# Altium PCB mod_hw_tb6612.PcbDoc
Units mil, origin at the board's own origin, x right, y up, seen from the top; angles counter-clockwise.
Board outline 930 x 1255 mil, 2 copper layers (Top Layer, Bottom Layer); 19 components, 34 nets, 142 pads, 49 vias.
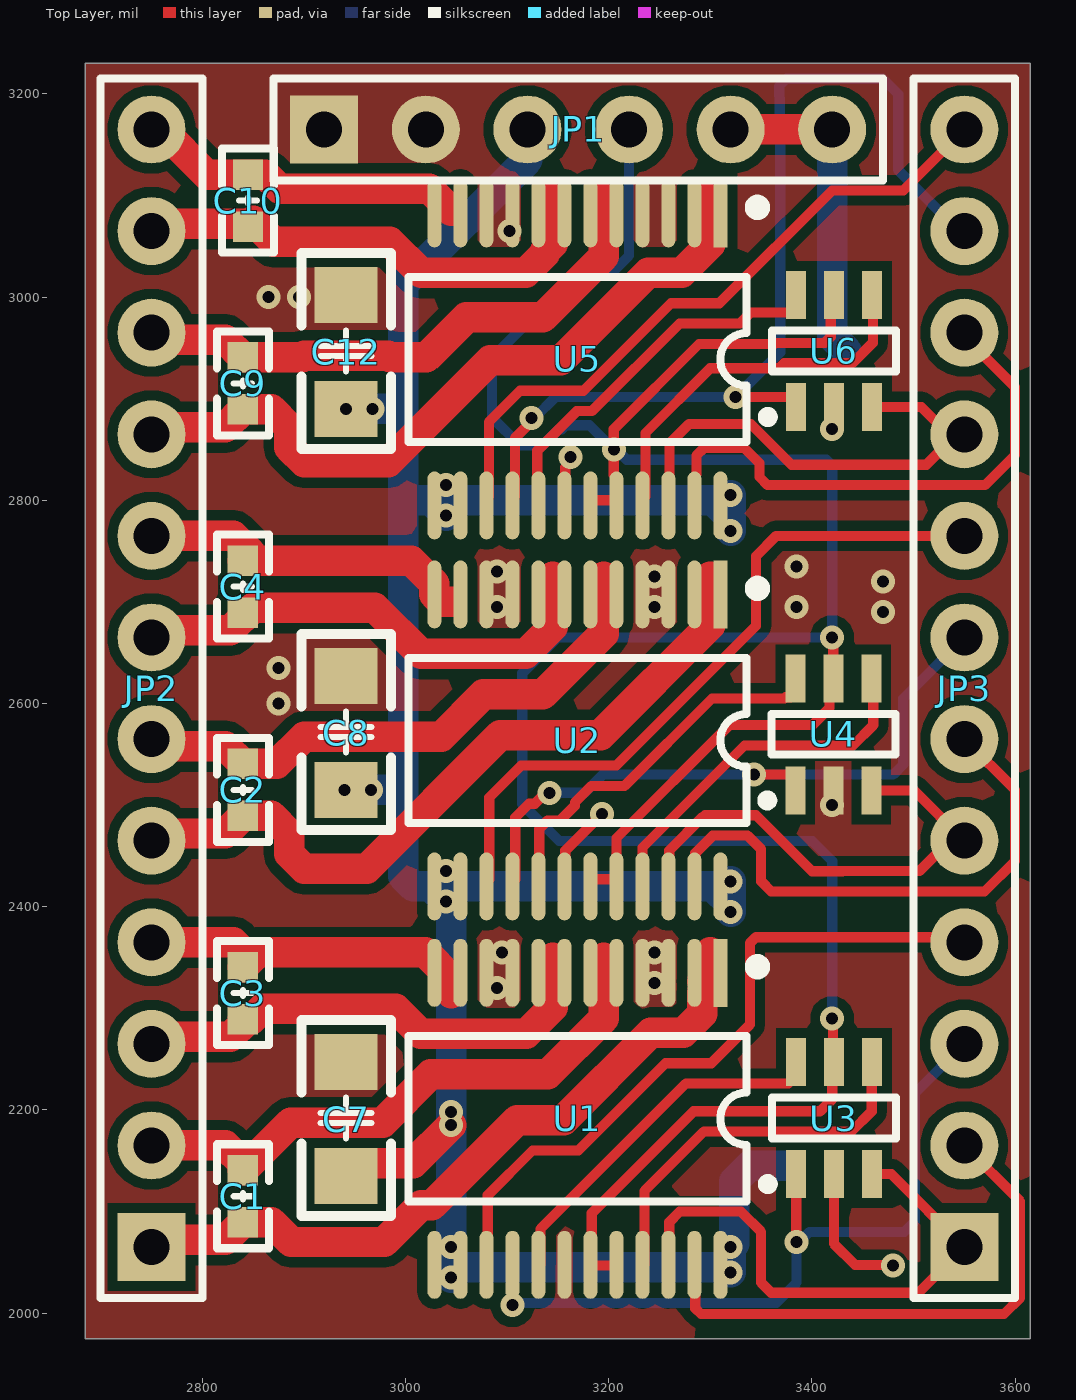
[diagram p0: Top Layer view]
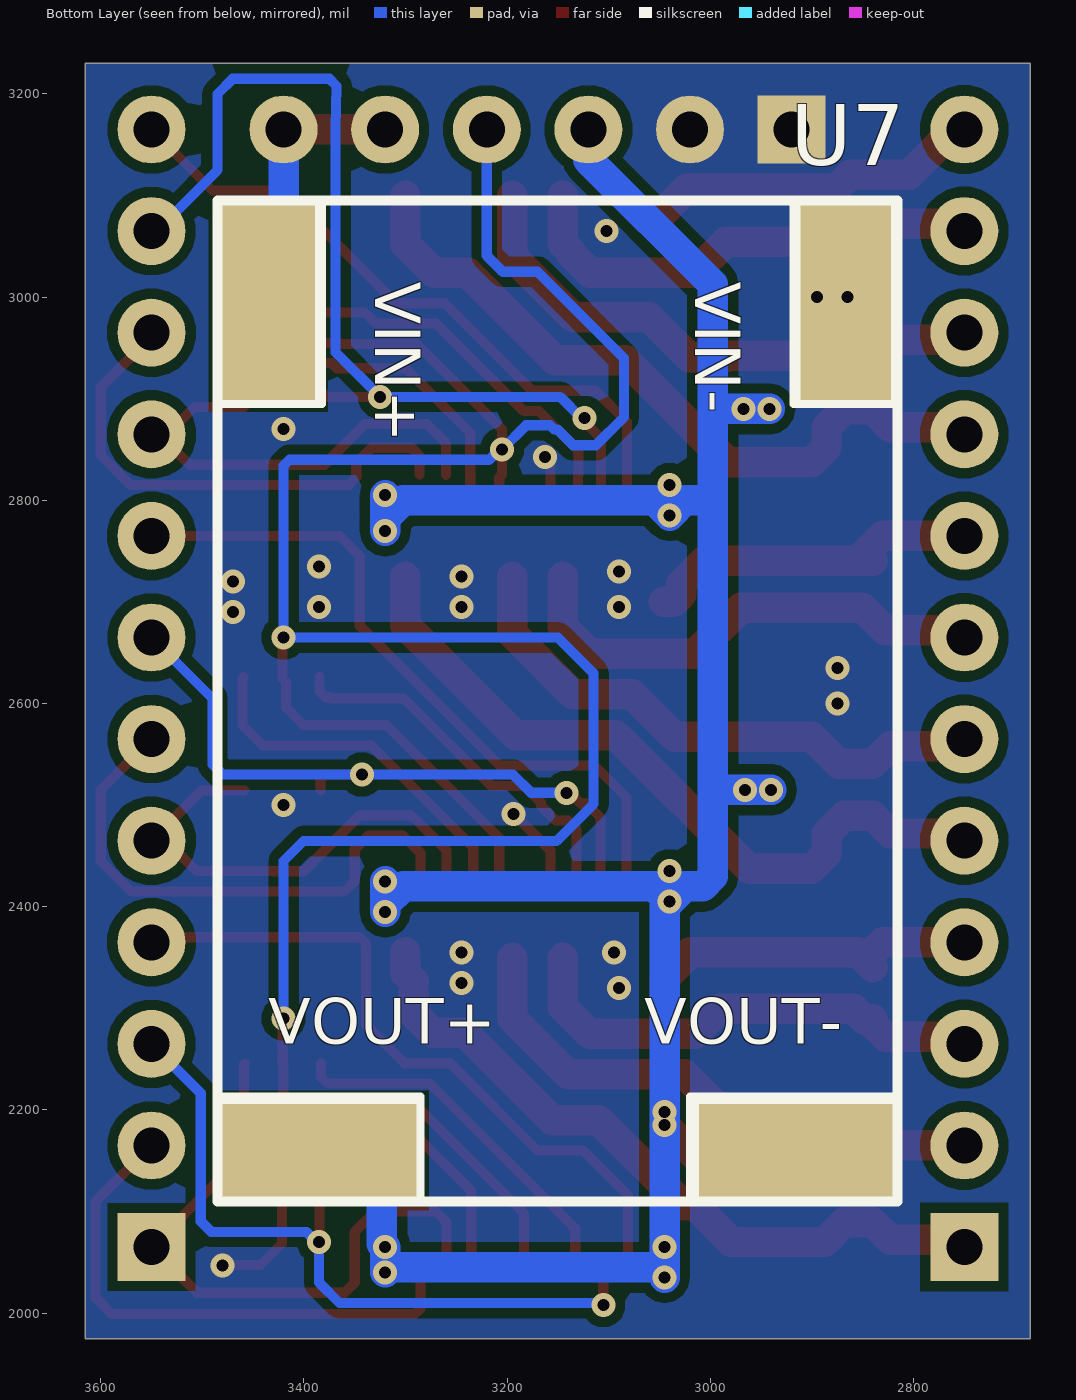
[diagram p1: Bottom Layer view, seen from below]

## Layer stack, top to bottom
Top Solder: solder mask 0.4, Solder Resist, Dk 3.5
Top Layer: signal copper 1.4
Dielectric 1: dielectric 12.6, FR-4, Dk 4.8
Bottom Layer: signal copper 1.4
Bottom Solder: solder mask 0.4, Solder Resist, Dk 3.5

## Board outline
2685,1975 2685,3230 3615,3230 3615,1975

## Design rules (kind name [scope] priority, off if disabled: settings)
Clearance [All] p1: gap=10 ignorepadtopadclearanceinfootprint=FALSE
ComponentClearance [All] p1: gap=0 collisioncheckmode=3 verticalgap=100000 showdistances=FALSE
PlaneConnect [All] p1: planeconnectstyle=Direct reliefexpansion=20 reliefentries=4 reliefconductorwidth=10 reliefairgap=10
PolygonConnect [All] p1: connectstyle=Direct reliefconductorwidth=10 reliefentries=4 polygonreliefangle="90 Angle" airgapwidth=10
RoutingVias [All] p1: holewidth=28 width=50 viastyle="Through Hole" minholewidth=28 minwidth=50 maxholewidth=28 maxwidth=50
SolderMaskExpansion [All] p1: expansion=4 istentingtop=FALSE
SupplyNets "Schematic Supply Nets_3" [InNet('3V3_IN')] p1: voltage=0.000
SupplyNets "Schematic Supply Nets_2" [InNet('VCC')] p2: voltage=0.000
SupplyNets "Schematic Supply Nets_1" [InNet('12V_OUT')] p3: voltage=0.000
SupplyNets "Schematic Supply Nets" [InNet('GND')] p4: voltage=0.000
Width [All] p1: maxlimit=100 minlimit=10 preferedwidth=10 minimp=50.000000 maximp=50.000000 favimp=50.000000
28 further rules are at their usual default settings.

## Components (designator, comment, footprint, x,y, rotation, side; value= is the part's Value field where it differs from the comment)
C1 "100nF" "C 0603_L" 2840,2115 r270 top
C2 "100nF" "C 0603_L" 2840,2515 r270 top
C3 "100nF" "C 0603_L" 2840,2315 r270 top
C4 "100nF" "C 0603_L" 2840,2715 r270 top
C7 "100nF" "C 1206_L" 2941.61,2192.02 r270 top
C8 "100nF" "C 1206_L" 2941.61,2572.02 r270 top
C9 "100nF" "C 0603_L" 2840,2915 r270 top
C10 "100nF" "C 0603_L" 2845,3095 r270 top
C12 "100nF" "C 1206_L" 2941.61,2947.02 r270 top
JP1 "HDR-1X6" HDR2.54-M-LI-6P 3170,3165 r0 top
JP2 "HDR-1X12" HDR2.54-M-LI-12P 2750,2615 r90 top
JP3 "HDR-1X12" HDR2.54-M-LI-12P 3550,2615 r90 top
U1 "TB6612FNG" SSOP24_N 3169.25,2191.3 r270 top
U2 "TB6612FNG" SSOP24_N 3169.25,2563.7 r270 top
U3 "SN76LVC2G14DBV" SOT23-6N 3421.61,2192.02 r0 top
U4 "SN76LVC2G14DBV" SOT23-6N 3421.1,2569.64 r0 top
U5 "TB6612FNG" SSOP24_N 3169.25,2938.7 r270 top
U6 "SN76LVC2G14DBV" SOT23-6N 3421.61,2947.02 r0 top
U7 "temp_dcdc" TEMP_12V 3210,2590 r270 bottom

## Footprints (in the part's own frame and the unit in brackets; to place one, negate y for a bottom-side part, rotate by r counter-clockwise, add the part's x,y. Pads: shape width x height; smd on the part's side, far side on the other; paste and mask are expansions set on the pad)
"C 0603_L" [mil] "无极性贴片电容"
  rect 30x30 smd: 1(-25.59,0) 2(25.59,0)
  silkscreen extent -51,-26 51,26, body extent -31,-16 31,16, height 32
"C 1206_L" [mil] "无极性贴片电容"
  rect 55x62 smd: 1(-55.12,0) 2(57.09,0)
  silkscreen extent -96,-44 96,44, body extent -63,-32 63,32, height 48
HDR2.54-M-LI-6P [mm] "排母，6脚"
  rect 1.7x1.7 hole 0.9: 1(-6.35,0)
  round 1.7 hole 0.9: 2(-3.81,0) 3(-1.27,0) 4(1.27,0) 5(3.81,0) 6(6.35,0)
  silkscreen extent -7.62,-1.27 7.62,1.27, body extent -7.62,-1.27 7.62,1.27, height 8.5
HDR2.54-M-LI-12P [mm] "排母，12脚"
  rect 1.7x1.7 hole 0.9: 1(-13.97,0)
  round 1.7 hole 0.9: 2(-11.43,0) 3(-8.89,0) 4(-6.35,0) 5(-3.81,0) 6(-1.27,0) 7(1.27,0) 8(3.81,0) 9(6.35,0) 10(8.89,0) 11(11.43,0) 12(13.97,0)
  silkscreen extent -15.24,-1.27 15.24,1.27, body extent -15.24,-1.27 15.24,1.27, height 8.5
SOT23-6N [mm] "3x1.6x1.1mm(长宽高)"
  rect 0.5x1.2 smd: 1(-0.95,-1.4) 2(0,-1.4) 3(0.95,-1.4) 4(0.95,1.4) 5(0,1.4) 6(-0.95,1.4)
  silkscreen extent -1.78,-1.78 1.55,0.51, body extent -1.5,-1.4 1.5,1.4, height 1.15
SSOP24_N [mm] "8.3*7.8*1.6（长宽高）"
  rect 1.7x0.35 smd: 1(-3.65,3.575)
  oval 1.7x0.35 smd: 2(-3.65,2.925) 3(-3.65,2.275) 4(-3.65,1.625) 5(-3.65,0.975) 6(-3.65,0.325) 7(-3.65,-0.325) 8(-3.65,-0.975) 9(-3.65,-1.625) 10(-3.65,-2.275) 11(-3.65,-2.925) 12(-3.65,-3.575) 13(3.65,-3.575) 14(3.65,-2.925) 15(3.65,-2.275) 16(3.65,-1.625) 17(3.65,-0.975) 18(3.65,-0.325) 19(3.65,0.325) 20(3.65,0.975) 21(3.65,1.625) 22(3.65,2.275) 23(3.65,2.925) 24(3.65,3.575)
  silkscreen extent -3.93,-4.23 2.06,4.63, body extent -3.85,-4.15 3.85,4.15, height 1.65
TEMP_12V [mm]
  rect 5x2.5 smd paste+0 mask+0.051: 2(-10.287,-5.715) 3(-10.287,8.763)
  rect 2.5x5 smd paste+0 mask+0.051: 4(10.922,-4.445) 5(10.922,7.493)
  silkscreen extent -12.83,-6.99 12.19,10.03

## Part data
C1 C2 C3 C4 C7 C8 C9 C10 C12: library part C, "无极性贴片电容", BOM名称=无极性贴片电容, 学习资源=www.ooocke.com, 版权归属=源创客
JP1: library part "Header 6", "6P接插件", BOM名称=6P接插件, 学习资源=www.ooocke.com, 版权归属=源创客
JP2 JP3: library part "Header 12", "12P接插件", BOM名称=12P接插件, 学习资源=www.ooocke.com, 版权归属=源创客
U1 U2 U5: library part Component_1
U7: "升降压模块"

## Via types
v1: diameter 23.62, hole 11.81, Top Layer to Bottom Layer, 49 vias

## Nets (pads, with @x,y where several pads share a name; then routed paths per layer and width w, separated by ;. In a path a pad name is that pad's centre, name@x,y a point inside that pad or via, vN(x,y) a via of type N, cw(c..) or ccw(c..) an arc to the next point about the centre after c; other vN are vias at no path point)
3V3_IN: JP1.4 U1.19 U1.20 U2.19 U2.20 U3.5 U4.5 U5.19 U5.20 U6.5 | length 3066.9
  Top Layer w10: U5.19@3182.05,2800 U5.20@3207.64,2800 ; U2.19@3184.84,2427.02 U2.20@3207.64,2427.02 ; U2.20 U2.20@3207.64,2427.02 ; U5.20 U5.20@3207.64,2800 ; U1.20@3208.97,2047.02 3183.38,2047.02 3183.38,2098.38 3283.7,2198.7 3408.09,2198.7 3420,2210.61 3420,2245.53 U3.5 3420.81,2247.94 3420.81,2289.19 v1(3420,2290) ; U4.5@3417.47,2621.26 3417.47,2595.74 3400.43,2578.7 3318.7,2578.7 3207.64,2467.64 U2.20@3207.64,2427.02 ; v1(3420,2665) 3421.1,2663.9 U4.5 ; U6.5 3418.63,2999.16 3418.63,2960.86 3412.77,2955 3364.34,2955 3363.28,2953.94 3288.94,2953.94 3205,2870 v1(3205,2850) 3205,2825.24 3207.64,2822.6 U5.20@3207.64,2800
  Bottom Layer w10: JP1.4 3220,3040.86 3204.14,3025 3170,3025 3085,2940 3085,2881.93 3112.77,2854.15 3134.98,2854.15 3150.69,2869.86 3153.76,2869.86 3157.82,2873.91 3181.09,2873.91 v1(3205,2850) 3207.67,2850 3217.67,2840 3414.14,2840 3420,2834.14 v1(3420,2665) 3150,2665 3114.88,2629.88 3114.88,2501.02 3151.24,2464.66 3400.34,2464.66 3420,2445 v1(3420,2290)
12V_OUT: C7.2 C8.2 C12.2 JP1.3 U1.13 U1.14 U1.24 U2.13 U2.14 U2.24 U5.13 U5.14 U5.24 U7.4 | length 2547.2
  Top Layer w30: C7.2 2954.11,2147.43 3007.43,2147.43 v1(3045,2185)
  Bottom Layer w30: v1(2940,2515) v1(2965.85,2515) 2991.69,2515 ; v1(2941.61,2889.93) v1(2967.46,2889.93) 2995,2889.93 ; v1(3045,2035) 3045,2045 v1@3310,2045 ; 3045,2049.54 v1(3045,2065) v1(3045,2185) v1(3045,2198.19) 3045,2400 v1(3040,2405) ; JP1.3 3120,3135 2997.61,3012.61 2997.61,2800 ; v1(3320,2040) v1(3320,2065) 3323.5,2068.5 3323.5,2129.76 3338.74,2145 U7.4@3375,2145 ; v1(3320,2395) v1@3320,2402.43 ; v1(3320,2425) v1@3320,2402.43 ; v1(3320,2770) 3320,2782.43 3302.43,2800 3055,2800 v1(3040,2785) 3025,2800 2997.61,2800 ; 3320,2785 v1(3320,2805) ; 2997.61,2800 2997.61,2430 3007.61,2420 3025,2420 v1(3040,2405) ; v1(3040,2405) 3055,2420 3302.43,2420 v1@3320,2402.43
  other v1: 3040,2435 3040,2815
DIR_M1: JP3.1 U1.22 U3.3 | length 538.9
  Top Layer w10: U1.22 3259.54,2048.32 3259.54,2089.54 3270,2100 3330,2100 3350,2080 3350,2030 3360,2020 3505,2020 JP3.1 3478.1,2136.9 U3.3
DIR_M2: JP3.3 U1.16 U3.1 | length 755.3
  Top Layer w10: v1(3105.28,2008.03) U1.16 ; U3.1 3384.6,2136.51 3384.6,2070.4 v1(3385,2070)
  Bottom Layer w10: v1(3105.28,2008.03) 3107.25,2010 3365,2010 3385,2030 v1(3385,2070) 3387.67,2070 3397.67,2080 3491.21,2080 3501.54,2090.32 3501.54,2216.54 JP3.3
DIR_M3: JP3.5 U2.22 U4.3 | length 487.7
  Top Layer w10: U2.22 3259.54,2420.72 3259.54,2455.36 3292.65,2488.46 3293.46,2488.46 3295,2490 3345,2490 3400.04,2434.96 3429.96,2434.96 3430,2435 3505.64,2435 3530.64,2460 3545,2460 JP3.5 3500.48,2514.52 U4.3
DIR_M4: JP3.7 U2.16 U4.1 | length 667.6
  Top Layer w10: U2.16@3108.07,2427.02 3108.07,2487.82 3121.61,2501.36 3127.24,2501.36 3138,2512.13 v1(3141.69,2512.13) ; v1(3342.92,2530) 3378.85,2530 3383.7,2525.16 U4.1
  Bottom Layer w10: v1(3141.69,2512.13) 3176.29,2512.13 3194.17,2530 3480,2530 3490,2540 3490,2605 JP3.7
DIR_M5: JP3.9 U5.22 U6.3 | length 441
  Top Layer w10: U5.22@3260,2825 3260,2856.11 3278.89,2875 3340,2875 3380,2835 3512.5,2835 3540.48,2862.98 3536.62,2862.98 3507.69,2891.9 U6.3
DIR_M6: JP3.11 U5.16 U6.1 | length 967.3
  Top Layer w10: U5.16@3107.63,2803.32 3107.63,2861.03 3123.88,2877.28 v1(3123.88,2880.96) ; v1(3325,2901.81) 3379.37,2901.81 3380,2902.44 U6.1@3380,2905
  Bottom Layer w10: v1(3123.88,2880.96) 3126.95,2880.96 3147.8,2901.81 v1(3325,2901.81) 3368.8,2945.62 3368.8,3164.25 ; 3368.8,3164.29 ccw(c3298.66,3164.29) 3368.79,3165.83 3367.87,3207.87 3375,3215 3470,3215 3485,3200 3485,3125 3545,3065 JP3.11
GND: C7.1 C8.1 C12.1 JP1.1 JP1.2 U1.3 U1.4 U1.9 U1.10 U1.18 U2.3 U2.4 U2.9 U2.10 U2.18 U3.2 U4.2 U5.3 U5.4 U5.9 U5.10 U5.18 U6.2 U7.3 U7.5 | length 272.8
  Top Layer w10: U2.18 3157.18,2420.72 3157.18,2455.1 v1(3193.55,2491.47) ; U5.18 3157.18,2795.72 3157.18,2832.18 3159.95,2834.95 3159.95,2840.04 v1(3162.56,2842.64) ; U3.2 3421.61,2068.39 3442.64,2047.36 3479.45,2047.36 v1(3480,2046.81)
  other v1: 3090,2320 3245,2325 3095,2355 3245,2355 3420,2500 2875,2600 2875,2635 3470,2690 3090,2695 3245,2695 3385,2695 3470,2720 3245,2725 3090,2730 3385,2735 3420,2870 2865,3000 2895,3000 3102.16,3065
M1+: C1.2 JP2.1 U1.1 U1.2 | length 706.4
  Top Layer w30: JP2.1 2757.07,2072.07 2822.65,2072.07 C1.2 2868.04,2089.41 2887.45,2070 2979.23,2070 3015.29,2106.06 3026.06,2106.06 3110,2190 3155.58,2190 3241.54,2275.96 3273.36,2275.96 3292.04,2294.64 3292.04,2315.96 ; 3292.04,2326.47 3300,2334.42 3300,2355
M1-: C1.1 JP2.2 U1.5 U1.6 | length 581
  Top Layer w30: JP2.2 2822.42,2165 2840,2147.43 C1.1 2886.84,2187.43 2977.43,2187.43 3025,2235 3140,2235 3195,2290 3195,2335 3195,2350
M2+: C3.2 JP2.3 U1.7 U1.8 | length 480.7
  Top Layer w30: JP2.3 2757.07,2272.07 2827.65,2272.07 C3.2@2842.5,2286.91 ; C3.2 2848.78,2289.41 2859.01,2299.64 2990.36,2299.64 3015,2275 3118.86,2275 3145,2301.14 3145,2335 3145,2350
M2-: C3.1 JP2.4 U1.11 U1.12 | length 340.6
  Top Layer w30: JP2.4 2830.59,2365 C3.1@2847.5,2348.09 ; C3.1 C3.1@2847.5,2348.09 ; 3045,2315 3045,2329.61 3019.61,2355 2854.4,2355 C3.1@2847.5,2348.09
M3+: C2.2 JP2.5 U2.1 U2.2 | length 740.5
  Top Layer w30: JP2.5 2757.07,2472.07 2822.65,2472.07 C2.2 2868.04,2489.41 2885.61,2471.84 2885.61,2452.08 2900.26,2437.43 2961.74,2437.43 3093.24,2568.94 3192.03,2568.94 3300,2676.91 3300,2725
M3-: C2.1 JP2.6 U2.5 U2.6 | length 564.4
  Top Layer w30: JP2.6 2757.07,2557.93 2822.66,2557.93 C2.1 2873.42,2540.59 2900.26,2567.43 3035.17,2567.43 3076.67,2608.94 3135.05,2608.94 3195,2668.88 3195,2725
M4+: C4.2 JP2.7 U2.7 U2.8 | length 486.6
  Top Layer w30: JP2.7 2757.07,2672.07 2827.65,2672.07 2850,2694.41 2969.82,2694.41 3015.29,2648.94 3060.11,2648.94 3118.48,2648.94 3145,2675.45 3145,2725
M4-: C4.1 JP2.8 U2.11 U2.12 | length 333.2
  Top Layer w30: JP2.8 2830.59,2765 C4.1@2847.5,2748.09 ; C4.1 3005.67,2740.59 3028.5,2717.76 U2.12 3035.91,2700 3045.78,2700
M5+: C9.2 JP2.9 U5.1 U5.2 | length 730.1
  Top Layer w30: JP2.9 2757.07,2872.07 2822.65,2872.07 C9.2 2868.04,2889.41 2885.61,2871.84 2885.61,2852.08 2900.26,2837.43 2982.97,2837.43 3083.31,2937.77 3152.77,2937.77 3238.94,3023.94 3272.03,3023.94 3300,3051.91 3300,3082.4 3300,3100
M5-: C9.1 JP2.10 U5.5 U5.6 | length 557.8
  Top Layer w30: JP2.10 2757.07,2957.93 2822.66,2957.93 C9.1 2898.42,2940.59 2900.26,2942.43 2982.97,2942.43 2984.81,2940.59 3020.59,2940.59 3060,2980 3135,2980 3195,3040 3195,3082.4 3195,3100
M6+: C10.2 JP2.11 U5.7 U5.8 | length 480.8
  Top Layer w30: JP2.11 2757.07,3072.07 2847.07,3072.07 2850,3075 2870.36,3054.64 2984.59,3054.64 3015.29,3023.94 3118.48,3023.94 3137.16,3042.62 3137.16,3044.74 3145,3052.57 3145,3100
M6-: C10.1 JP2.12 U5.11 U5.12 | length 328.1
  Top Layer w30: JP2.12 2759.99,3165 2804.4,3120.59 C10.1 2862.12,3120.59 2876.18,3106.54 3023.46,3106.54 3045,3085
NetU1_17: U1.17 U3.6 | length 361.9
  Top Layer w10: U1.17@3132.2,2047.02 3132.92,2047.74 3132.92,2082.92 3275.96,2225.96 3376.81,2225.96 3383.19,2232.34 U3.6@3383.19,2245.84
NetU1_21: U1.21 U3.4 | length 377.3
  Top Layer w10: U1.21@3234.56,2047.02 3235.29,2047.74 3235.29,2120.29 3293.7,2178.7 3438.98,2178.7 3458.98,2198.7 3458.98,2244.85 U3.4@3457.99,2245.84
NetU2_17: U2.17 U4.6 | length 373.5
  Top Layer w10: U2.17@3131.59,2428.04 3131.59,2476.59 3140,2485 3152.48,2485 3166.74,2499.26 3166.74,2502.57 3183.1,2518.94 3215.65,2518.94 3301.72,2605 3373,2605 3374.13,2606.13 3378.85,2606.13 3384.64,2611.92 U4.6@3384.64,2625.84
NetU2_21: U2.21 U4.4 | length 362.9
  Top Layer w10: U2.21 3233.23,2458.23 3333.7,2558.7 3440.43,2558.7 3460.43,2578.7 3460.43,2624.85 U4.4@3459.44,2625.84
NetU5_17: U5.17 U6.6 | length 369.6
  Top Layer w10: U5.17@3130.87,2805.07 3130.14,2805.79 3130.14,2825.21 3129.65,2825.71 3129.65,2848.81 3168.61,2887.77 3183.48,2887.77 3269.65,2973.94 3328.94,2973.94 3339.8,2984.8 3379.37,2984.8 3384.21,2989.64 U6.6
NetU5_21: U5.21 U6.4 | length 371.3
  Top Layer w10: U5.21@3235.59,2803.32 3236.31,2804.04 3236.31,2866.31 3300,2930 3367.63,2930 3372.63,2935 3440,2935 3460,2955 3460,3001.15 U6.4
PWM_M1: JP3.2 U1.23 | length 544.6
  Top Layer w10: U1.23 3285.13,2046.88 3285.13,2004.87 3290.87,1999.13 3589.13,1999.13 3605,2015 3605,2110 JP3.2
PWM_M2: JP3.4 U1.15 | length 690
  Top Layer w10: U1.15@3081.02,2047.02 3081.02,2116.02 3125,2160 3170,2160 3255.96,2245.96 3300.96,2245.96 3338.98,2283.98 3338.98,2364.14 3344.83,2370 JP3.4@3549.9,2370
PWM_M3: JP3.6 U2.23 | length 541.9
  Top Layer w10: U2.23@3284.41,2427.6 3285.13,2428.32 3285.13,2452.66 3302.47,2470 3336.72,2470 3350,2456.72 3350,2425 3360.04,2414.96 3569.96,2414.96 3600,2445 3600,2515 JP3.6
PWM_M4: JP3.8 U2.15 | length 694.7
  Top Layer w10: U2.15@3082.48,2427.02 3082.48,2507.48 3113.94,2538.94 3207.37,2538.94 3345,2676.57 3345,2745 3365,2765 JP3.8
PWM_M5: JP3.10 U5.23 | length 510.5
  Top Layer w10: U5.23@3286.31,2825.72 3286.31,2844.14 3293.96,2851.78 3333.22,2851.78 3348.39,2836.61 3348.39,2822.98 3356.37,2815 3570.41,2815 3600,2844.59 3600,2911.37 JP3.10@3548.39,2962.98
PWM_M6: JP3.12 U5.15 | length 661
  Top Layer w10: U5.15@3082.04,2803.32 3082.04,2877.04 3112.77,2907.77 3175.2,2907.77 3261.36,2993.94 3308.94,2993.94 3420,3105 3490,3105 JP3.12
VCC: JP1.5 JP1.6 U7.2 | length 325.3
  Top Layer w30: JP1.5 JP1.6
  Bottom Layer w30: JP1.6 3420,2960.93 U7.2@3435,2945.93

## Polygon pours and split planes (outlines as drawn)
GND on Top Layer "GND_L01_P000" (solid, pour order 0): 2685,1975 2685,3230 3615,3230 3615,1975
GND on Bottom Layer "GND_L02_P001" (solid, pour order 1): 2685,1975 2685,3230 3615,3230 3615,1975

## Silkscreen, mask and mechanical layers (free items; w line width, h text height)
Mechanical 1:
  the board outline again, w10

## Text inside footprints (layer, text, board x,y; h text height)
U7: Bottom Overlay "VOUT-" at 3065,2265 h45; Bottom Overlay "VOUT+" at 3435,2265 h45; Bottom Overlay "VIN+" at 3330,3015 h45 r90; Bottom Overlay "VIN-" at 3015,3015 h45 r90